# EAGLE board femtoBeacon_dongle_r2.0.6_RGB_PANELIZED (EAGLE 7.6.0), part 1 of 3
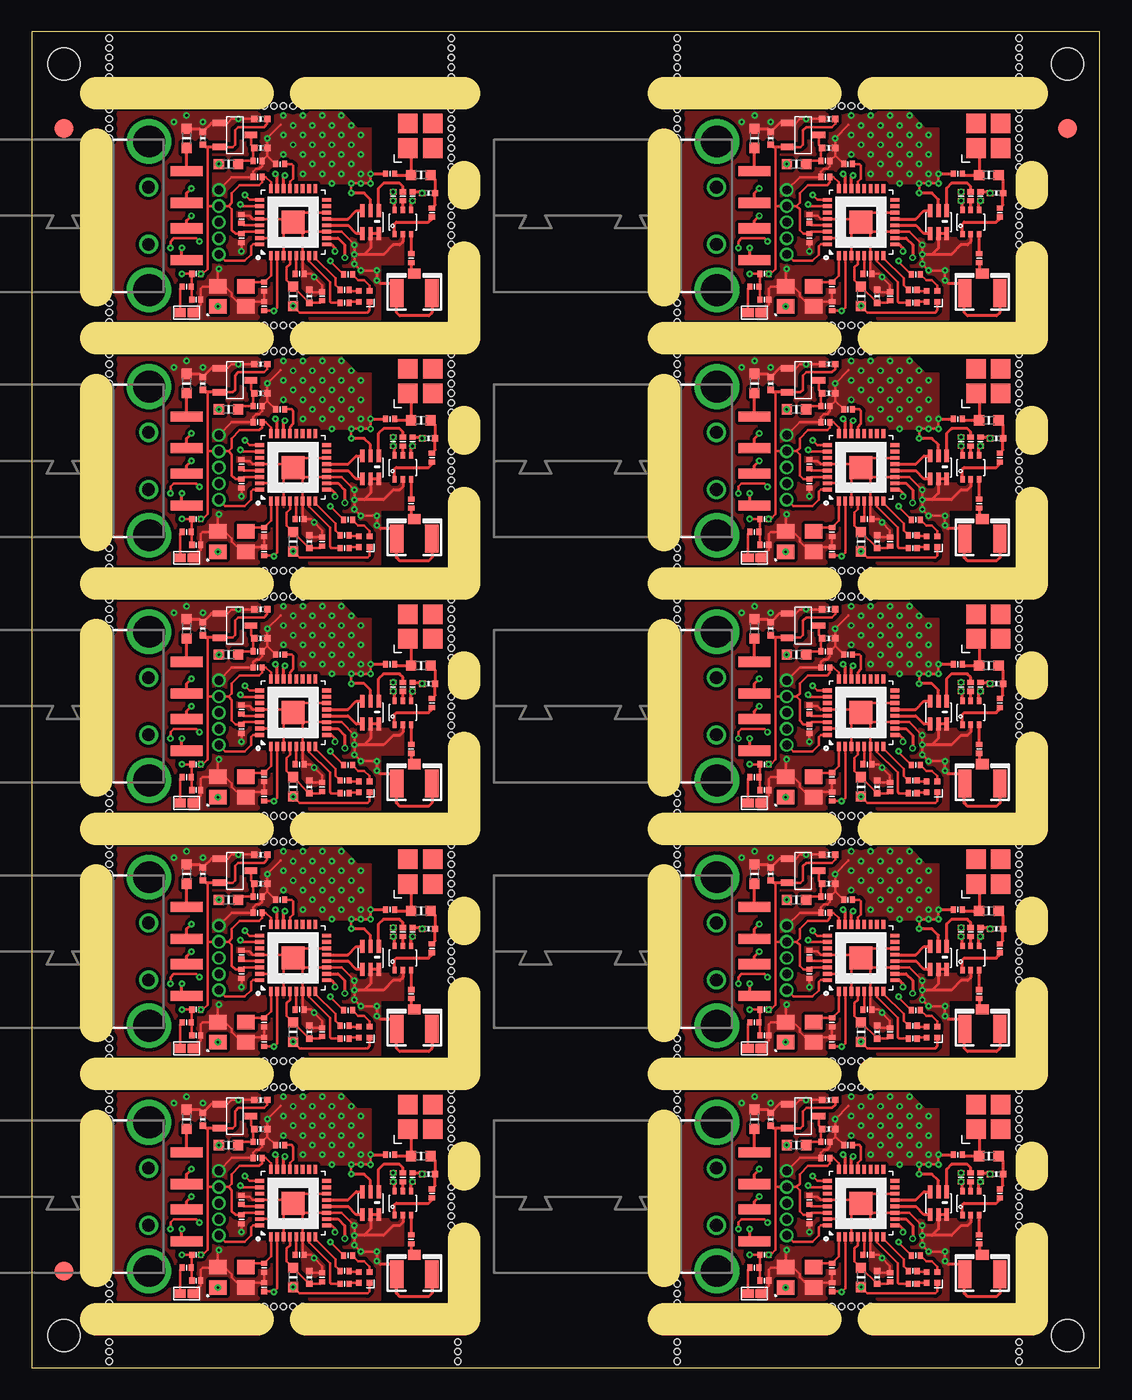
[diagram p0: board, top side]
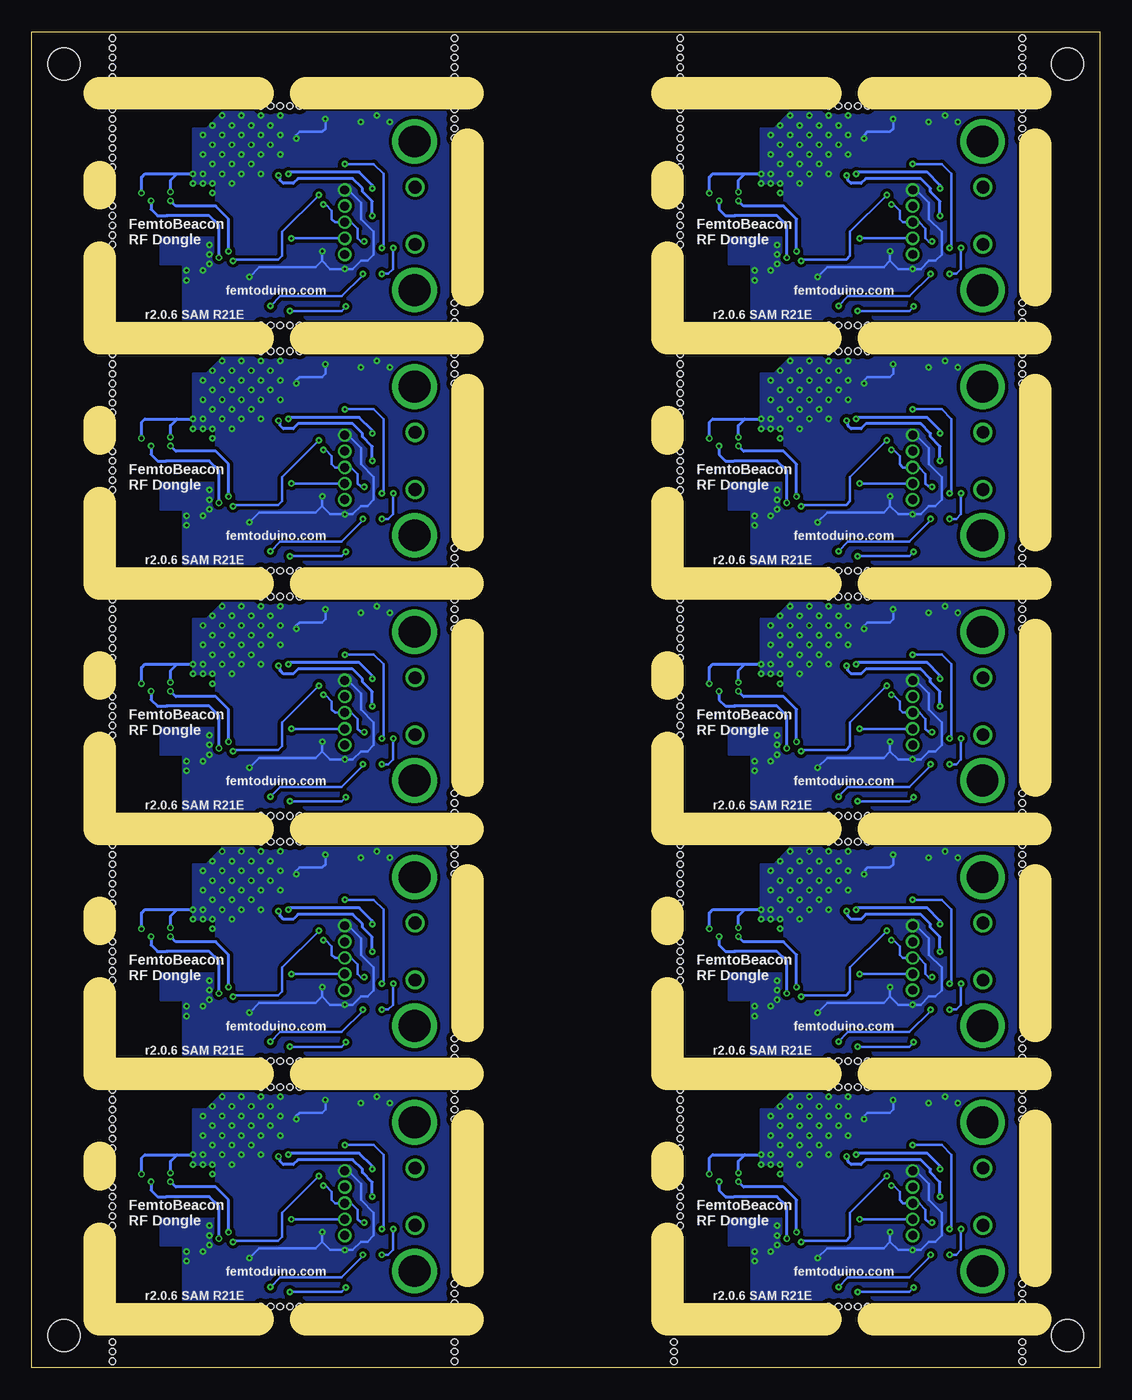
[diagram p1: board, bottom side, seen from below]

Size 84.07 x 105.16 mm. Coordinates in mm from the lower left corner, seen from the top.
Outline: 0,0 84.07,0 84.07,105.16 0,105.16 0,0
Copper layers (1*16): Top 0.035559375mm / dielectric 1.6mm / Bottom 0.035559375mm
Design rules "oshpark-2layer *": minimum track width 6mil, minimum drill 10mil, track to track 6mil, track to pad 6mil, pad to pad 6mil, via to via 6mil, smd to smd 6mil, copper to edge 15mil, drill to drill 6mil, minimum pad ring 5mil, minimum via ring 5mil, stop-mask expansion 2.5mil, vias tented up to drill 10mil, thermal gap 10mil
Holes 2.54 mm at 2.54,2.54 2.54,102.62 81.53,102.62 81.53,2.54
Holes 0.51 mm at 6.1,21.84 6.1,21.08 6.1,20.32 6.1,19.56 6.1,5.08 6.1,5.84 6.1,6.6 19.81,4.83 19.05,4.83 18.29,4.83 20.57,4.83 21.34,4.83 33.02,12.7 33.02,13.46 33.02,14.22 33.02,11.94 33.02,11.18 19.81,22.1 19.05,22.1 18.29,22.1 20.57,22.1 21.34,22.1 33.53,0.51 33.53,1.27 33.53,2.03 6.1,0.51 6.1,1.27 6.1,2.03 33.02,21.84 33.02,21.08 33.02,20.32 33.02,19.56 33.02,18.8 33.02,18.03 33.02,17.27 50.8,21.84 50.8,21.08 50.8,20.32 50.8,19.56 50.8,5.08 50.8,5.84 50.8,6.6 64.52,4.83 63.75,4.83 62.99,4.83 65.28,4.83 66.04,4.83 77.72,12.7 77.72,13.46 77.72,14.22 77.72,11.94 77.72,11.18 64.52,22.1 63.75,22.1 62.99,22.1 65.28,22.1 66.04,22.1 77.72,21.84 77.72,21.08 77.72,20.32 77.72,19.56 77.72,18.8 77.72,18.03 77.72,17.27 6.1,41.15 6.1,40.39 6.1,39.62 6.1,38.86 6.1,24.38 6.1,25.15 6.1,25.91 19.81,24.13 19.05,24.13 18.29,24.13 20.57,24.13 21.34,24.13 33.02,32 33.02,32.77 33.02,33.53 33.02,31.24 33.02,30.48 19.81,41.4 19.05,41.4 18.29,41.4 20.57,41.4 21.34,41.4 33.02,41.15 33.02,40.39 33.02,39.62 33.02,38.86 33.02,38.1 33.02,37.34 33.02,36.58 50.8,41.15 50.8,40.39 50.8,39.62 50.8,38.86 50.8,24.38 50.8,25.15 50.8,25.91 64.52,24.13 63.75,24.13 62.99,24.13 65.28,24.13 66.04,24.13 77.72,32 77.72,32.77 77.72,33.53 77.72,31.24 77.72,30.48 64.52,41.4 63.75,41.4 62.99,41.4 65.28,41.4 66.04,41.4 77.72,41.15 77.72,40.39 77.72,39.62 77.72,38.86 77.72,38.1 77.72,37.34 77.72,36.58 6.1,60.45 6.1,59.69 6.1,58.93 6.1,58.17 6.1,43.69 6.1,44.45 6.1,45.21 19.81,43.43 19.05,43.43 18.29,43.43 20.57,43.43 21.34,43.43 33.02,51.31 33.02,52.07 33.02,52.83 33.02,50.55 33.02,49.78 19.81,60.71 19.05,60.71 18.29,60.71 20.57,60.71 21.34,60.71 33.02,60.45 33.02,59.69 33.02,58.93 33.02,58.17 33.02,57.4 33.02,56.64 33.02,55.88 50.8,60.45 50.8,59.69 50.8,58.93 50.8,58.17 50.8,43.69 50.8,44.45 50.8,45.21 64.52,43.43 63.75,43.43 62.99,43.43 65.28,43.43 66.04,43.43 77.72,51.31 77.72,52.07 77.72,52.83 77.72,50.55 77.72,49.78 64.52,60.71 63.75,60.71 62.99,60.71 65.28,60.71 66.04,60.71 77.72,60.45 77.72,59.69 77.72,58.93 77.72,58.17 77.72,57.4 77.72,56.64 77.72,55.88 6.1,79.76 6.1,78.99 6.1,78.23 6.1,77.47 6.1,62.99 6.1,63.75 6.1,64.52 19.81,62.74 19.05,62.74 18.29,62.74 20.57,62.74 21.34,62.74 33.02,70.61 33.02,71.37 33.02,72.14 33.02,69.85 33.02,69.09 19.81,80.01 19.05,80.01 18.29,80.01 20.57,80.01 21.34,80.01 33.02,79.76 33.02,78.99 33.02,78.23 33.02,77.47 33.02,76.71 33.02,75.95 33.02,75.18 50.8,79.76 50.8,78.99 50.8,78.23 50.8,77.47 50.8,62.99 50.8,63.75 50.8,64.52 64.52,62.74 63.75,62.74 62.99,62.74 65.28,62.74 66.04,62.74 77.72,70.61 77.72,71.37 77.72,72.14 77.72,69.85 77.72,69.09 64.52,80.01 63.75,80.01 62.99,80.01 65.28,80.01 66.04,80.01 77.72,79.76 77.72,78.99 77.72,78.23 77.72,77.47 77.72,76.71 77.72,75.95 77.72,75.18 6.1,99.06 6.1,98.3 6.1,97.54 6.1,96.77 6.1,82.3 6.1,83.06 6.1,83.82 19.81,82.04 19.05,82.04 18.29,82.04 20.57,82.04 21.34,82.04 33.02,89.92 33.02,90.68 33.02,91.44 33.02,89.15 33.02,88.39 19.81,99.31 19.05,99.31 18.29,99.31 20.57,99.31 21.34,99.31 33.02,99.06 33.02,98.3 33.02,97.54 33.02,96.77 33.02,96.01 33.02,95.25 33.02,94.49 50.8,99.06 50.8,98.3 50.8,97.54 50.8,96.77 50.8,82.3 50.8,83.06 50.8,83.82 64.52,82.04 63.75,82.04 62.99,82.04 65.28,82.04 66.04,82.04 77.72,89.92 77.72,90.68 77.72,91.44 77.72,89.15 77.72,88.39 64.52,99.31 63.75,99.31 62.99,99.31 65.28,99.31 66.04,99.31 77.72,99.06 77.72,98.3 77.72,97.54 77.72,96.77 77.72,96.01 77.72,95.25 77.72,94.49 6.1,104.65 33.02,104.65 50.8,104.65 77.72,104.65 77.72,0.51 50.8,0.51 50.8,1.27 50.8,2.03 77.72,1.27 77.72,2.03 77.72,103.89 77.72,103.12 77.72,102.36 77.72,101.6 50.8,103.89 50.8,103.12 50.8,102.36 50.8,101.6 33.02,103.89 33.02,103.12 33.02,102.36 33.02,101.6 6.1,103.89 6.1,103.12 6.1,102.36 6.1,101.6
Milling: 54 lines

## Footprints (pad centres in the part's own frame; a part is rotated, then mirrored left to right if it is on the bottom)
AS222-92LF = smd 0.35 x 0.5: PIN1 -0.65,-0.95; PIN2 0,-0.95; PIN3 0.65,-0.95; PIN4 0.65,0.95; PIN5 0,0.95; PIN6 -0.65,0.95
SPST_SMD = smd 0.889 x 0.699: 1 -0.508,0; 2 0.508,0
PART = smd 0.4 x 0.5: 1 -0.35,0; 2 0.35,0
_0402MP = smd 0.5 x 0.5: 1 -0.508,0; 2 0.508,0
USB_A-SMT = drill 2.5 pad 3.302: D1 -5.85,2.958; D2 5.85,2.958 | drill 1: D3 -2.25,3; D4 2.25,3 | smd 0.8 x 2.5: D+ 1,0; D- -1,0; GND 3.5,0; VBUS -3.5,0
_0603MP = smd 0.8 x 0.8: 1 -0.762,0; 2 0.762,0
FIDUCIAL_1MM = smd 1.5 x 1.5: 1 0,0
MCP1700T-3302E/TT = smd 0.5 x 1: GND -0.95,-1.25; VIN 0,1.25; VOUT 0.95,-1.25
LRTB_R48G = smd 0.45 x 0.45: 1 0.425,0.425; 2 0.425,-0.425; 3 -0.425,-0.425; 4 -0.425,0.425
1X5_ROUND = drill 0.7 pad 1: P$1 0,0; P$2 0,-1.27; P$3 0,-2.54; P$4 0,-3.81; P$5 0,-5.08
0805_BALUN = smd 1 x 0.35: 1 -0.9,0.65; 2 -0.9,0; 3 -0.9,-0.65; 4 0.9,-0.65; 5 0.9,0; 6 0.9,0.65
QFN32 = smd 0.7 x 0.3: 1 -2.65,1.75; 2 -2.65,1.25; 3 -2.65,0.75; 4 -2.65,0.25; 5 -2.65,-0.25; 6 -2.65,-0.75; 7 -2.65,-1.25; 8 -2.65,-1.75; 17 2.65,-1.75; 18 2.65,-1.25; 19 2.65,-0.75; 20 2.65,-0.25; 21 2.65,0.25; 22 2.65,0.75; 23 2.65,1.25; 24 2.65,1.75 | smd 0.3 x 0.7: 9 -1.75,-2.65; 10 -1.25,-2.65; 11 -0.75,-2.65; 12 -0.25,-2.65; 13 0.25,-2.65; 14 0.75,-2.65; 15 1.25,-2.65; 16 1.75,-2.65; 25 1.75,2.65; 26 1.25,2.65; 27 0.75,2.65; 28 0.25,2.65; 29 -0.25,2.65; 30 -0.75,2.65; 31 -1.25,2.65; 32 -1.75,2.65 | smd 1.8 x 1.8: 33 0,0
0479480001 = smd 1.54 x 1.54: ANT -0.963,0.963; NC1 0.978,0.963; NC2 0.978,-0.978; NC3 -0.963,-0.978
U.FL = smd 2.2 x 1.05: 1 0,1.375; 2 0,-1.375 | smd 0.8 x 1: 3 1.525,0
TSX-3225 = smd 1.4 x 1.15: 1 -1.1,-0.8; 2 1.1,-0.8; 3 1.1,0.8; 4 -1.1,0.8

## Placement (x,y rotation side)
ASWITCH  AS222-92LF  [AS222-92LF]  29.21,12.95 0 top
ASWITCH1  AS222-92LF  [AS222-92LF]  73.91,12.95 0 top
ASWITCH2  AS222-92LF  [AS222-92LF]  29.21,32.26 0 top
ASWITCH3  AS222-92LF  [AS222-92LF]  73.91,32.26 0 top
ASWITCH4  AS222-92LF  [AS222-92LF]  29.21,51.56 0 top
ASWITCH5  AS222-92LF  [AS222-92LF]  73.91,51.56 0 top
ASWITCH6  AS222-92LF  [AS222-92LF]  29.21,70.87 0 top
ASWITCH7  AS222-92LF  [AS222-92LF]  73.91,70.87 0 top
ASWITCH8  AS222-92LF  [AS222-92LF]  29.21,90.17 0 top
ASWITCH9  AS222-92LF  [AS222-92LF]  73.91,90.17 0 top
BTN  DNP  [SPST_SMD]  12.19,5.84 0 top
BTN1  DNP  [SPST_SMD]  56.9,5.84 0 top
BTN2  DNP  [SPST_SMD]  12.19,25.15 0 top
BTN3  DNP  [SPST_SMD]  56.9,25.15 0 top
BTN4  DNP  [SPST_SMD]  12.19,44.45 0 top
BTN5  DNP  [SPST_SMD]  56.9,44.45 0 top
BTN6  DNP  [SPST_SMD]  12.19,63.75 0 top
BTN7  DNP  [SPST_SMD]  56.9,63.75 0 top
BTN8  DNP  [SPST_SMD]  12.19,83.06 0 top
BTN9  DNP  [SPST_SMD]  56.9,83.06 0 top
C1  0.1uF  [PART]  12.95,6.86 0 top
C2  0.1uF  [PART]  19.56,17.53 180 top
C3  0.1uF  [PART]  57.66,6.86 0 top
C4  0.1uF  [PART]  62.48,16.51 180 top
C5  2.2uF  [_0402MP]  18.03,21.08 180 top
C6  2.2uF  [_0402MP]  18.03,18.8 0 top
C7  0.47uF  [PART]  17.78,17.78 0 top
C8  0.1uF  [PART]  22.86,7.11 90 top
C9  0.1uF  [PART]  16.51,13.21 90 top
C10  0.1uF  [PART]  17.78,16.51 180 top
C11  1.2pF  [_0402MP]  31.24,15.24 180 top
C12  DNP  [PART]  72.9,16.76 180 top
C13  DNP  [PART]  28.19,16.76 180 top
C14  9pF  [PART]  18.29,6.35 270 top
C15  9pF  [PART]  18.29,7.87 270 top
C16  0.1uF  [PART]  16.51,11.68 270 top
C17  0.1uF  [PART]  21.08,8.89 0 top
C18  22pF  [PART]  29.21,14.99 270 top
C19  22pF  [PART]  29.97,14.99 270 top
C20  22pF  [PART]  28.45,14.99 90 top
C21  10uF  [_0402MP]  13.46,19.56 270 top
C22  10uF  [_0402MP]  21.84,7.11 270 top
C23  22pF  [PART]  29.87,10.11 90 top
C24  22pF  [PART]  31.5,13.72 90 top
C25  9pF  [PART]  62.99,6.35 270 top
C26  9pF  [PART]  62.99,7.87 270 top
C27  0.1uF  [PART]  61.21,11.68 270 top
C28  0.1uF  [PART]  65.79,8.89 0 top
C29  0.1uF  [PART]  64.26,17.53 180 top
C30  10uF  [_0402MP]  58.17,19.56 270 top
C31  10uF  [_0402MP]  66.55,7.11 270 top
C32  2.2uF  [_0402MP]  62.74,21.08 180 top
C33  2.2uF  [_0402MP]  62.74,18.8 0 top
C34  0.47uF  [PART]  62.48,17.78 0 top
C35  0.1uF  [PART]  67.56,7.11 90 top
C36  0.1uF  [PART]  61.21,13.21 90 top
C37  22pF  [PART]  73.91,14.99 270 top
C38  22pF  [PART]  74.68,14.99 270 top
C39  22pF  [PART]  73.15,14.99 90 top
C40  22pF  [PART]  74.57,10.11 90 top
C41  22pF  [PART]  76.2,13.72 90 top
C42  1.2pF  [_0402MP]  75.95,15.24 180 top
C43  0.1uF  [PART]  12.95,26.16 0 top
C44  0.1uF  [PART]  17.78,35.81 180 top
C45  DNP  [PART]  28.19,36.07 180 top
C46  9pF  [PART]  18.29,25.65 270 top
C47  9pF  [PART]  18.29,27.18 270 top
C48  0.1uF  [PART]  16.51,30.99 270 top
C49  0.1uF  [PART]  21.08,28.19 0 top
C50  0.1uF  [PART]  19.56,36.83 180 top
C51  10uF  [_0402MP]  13.46,38.86 270 top
C52  10uF  [_0402MP]  21.84,26.42 270 top
C53  2.2uF  [_0402MP]  18.03,40.39 180 top
C54  2.2uF  [_0402MP]  18.03,38.1 0 top
C55  0.47uF  [PART]  17.78,37.08 0 top
C56  0.1uF  [PART]  22.86,26.42 90 top
C57  0.1uF  [PART]  16.51,32.51 90 top
C58  22pF  [PART]  29.21,34.29 270 top
C59  22pF  [PART]  29.97,34.29 270 top
C60  22pF  [PART]  28.45,34.29 90 top
C61  22pF  [PART]  29.87,29.41 90 top
C62  22pF  [PART]  31.5,33.02 90 top
C63  1.2pF  [_0402MP]  31.24,34.54 180 top
C64  0.1uF  [PART]  57.66,26.16 0 top
C65  0.1uF  [PART]  62.48,35.81 180 top
C66  DNP  [PART]  72.9,36.07 180 top
C67  9pF  [PART]  62.99,25.65 270 top
C68  9pF  [PART]  62.99,27.18 270 top
C69  0.1uF  [PART]  61.21,30.99 270 top
C70  0.1uF  [PART]  65.79,28.19 0 top
C71  0.1uF  [PART]  64.26,36.83 180 top
C72  10uF  [_0402MP]  58.17,38.86 270 top
C73  10uF  [_0402MP]  66.55,26.42 270 top
C74  2.2uF  [_0402MP]  62.74,40.39 180 top
C75  2.2uF  [_0402MP]  62.74,38.1 0 top
C76  0.47uF  [PART]  62.48,37.08 0 top
C77  0.1uF  [PART]  67.56,26.42 90 top
C78  0.1uF  [PART]  61.21,32.51 90 top
C79  22pF  [PART]  73.91,34.29 270 top
C80  22pF  [PART]  74.68,34.29 270 top
C81  22pF  [PART]  73.15,34.29 90 top
C82  22pF  [PART]  74.57,29.41 90 top
C83  22pF  [PART]  76.2,33.02 90 top
C84  1.2pF  [_0402MP]  75.95,34.54 180 top
C85  0.1uF  [PART]  12.95,45.47 0 top
C86  0.1uF  [PART]  17.78,55.12 180 top
C87  DNP  [PART]  28.19,55.37 180 top
C88  9pF  [PART]  18.29,44.96 270 top
C89  9pF  [PART]  18.29,46.48 270 top
C90  0.1uF  [PART]  16.51,50.29 270 top
C91  0.1uF  [PART]  21.08,47.5 0 top
C92  0.1uF  [PART]  19.56,56.13 180 top
C93  10uF  [_0402MP]  13.46,58.17 270 top
C94  10uF  [_0402MP]  21.84,45.72 270 top
C95  2.2uF  [_0402MP]  18.03,59.69 180 top
C96  2.2uF  [_0402MP]  18.03,57.4 0 top
C97  0.47uF  [PART]  17.78,56.39 0 top
C98  0.1uF  [PART]  22.86,45.72 90 top
C99  0.1uF  [PART]  16.51,51.82 90 top
C100  22pF  [PART]  29.21,53.59 270 top
C101  22pF  [PART]  29.97,53.59 270 top
C102  22pF  [PART]  28.45,53.59 90 top
C103  22pF  [PART]  29.87,48.72 90 top
C104  22pF  [PART]  31.5,52.32 90 top
C105  1.2pF  [_0402MP]  31.24,53.85 180 top
C106  0.1uF  [PART]  57.66,45.47 0 top
C107  0.1uF  [PART]  62.48,55.12 180 top
C108  DNP  [PART]  72.9,55.37 180 top
C109  9pF  [PART]  62.99,44.96 270 top
C110  9pF  [PART]  62.99,46.48 270 top
C111  0.1uF  [PART]  61.21,50.29 270 top
C112  0.1uF  [PART]  65.79,47.5 0 top
C113  0.1uF  [PART]  64.26,56.13 180 top
C114  10uF  [_0402MP]  58.17,58.17 270 top
C115  10uF  [_0402MP]  66.55,45.72 270 top
C116  2.2uF  [_0402MP]  62.74,59.69 180 top
C117  2.2uF  [_0402MP]  62.74,57.4 0 top
C118  0.47uF  [PART]  62.48,56.39 0 top
C119  0.1uF  [PART]  67.56,45.72 90 top
C120  0.1uF  [PART]  61.21,51.82 90 top
C121  22pF  [PART]  73.91,53.59 270 top
C122  22pF  [PART]  74.68,53.59 270 top
C123  22pF  [PART]  73.15,53.59 90 top
C124  22pF  [PART]  74.57,48.72 90 top
C125  22pF  [PART]  76.2,52.32 90 top
C126  1.2pF  [_0402MP]  75.95,53.85 180 top
C127  0.1uF  [PART]  12.95,64.77 0 top
C128  0.1uF  [PART]  17.78,74.42 180 top
C129  DNP  [PART]  28.19,74.68 180 top
C130  9pF  [PART]  18.29,64.26 270 top
C131  9pF  [PART]  18.29,65.79 270 top
C132  0.1uF  [PART]  16.51,69.6 270 top
C133  0.1uF  [PART]  21.08,66.8 0 top
C134  0.1uF  [PART]  19.56,75.44 180 top
C135  10uF  [_0402MP]  13.46,77.47 270 top
C136  10uF  [_0402MP]  21.84,65.02 270 top
C137  2.2uF  [_0402MP]  18.03,78.99 180 top
C138  2.2uF  [_0402MP]  18.03,76.71 0 top
C139  0.47uF  [PART]  17.78,75.69 0 top
C140  0.1uF  [PART]  22.86,65.02 90 top
C141  0.1uF  [PART]  16.51,71.12 90 top
C142  22pF  [PART]  29.21,72.9 270 top
C143  22pF  [PART]  29.97,72.9 270 top
C144  22pF  [PART]  28.45,72.9 90 top
C145  22pF  [PART]  29.87,68.02 90 top
C146  22pF  [PART]  31.5,71.63 90 top
C147  1.2pF  [_0402MP]  31.24,73.15 180 top
C148  0.1uF  [PART]  57.66,64.77 0 top
C149  0.1uF  [PART]  62.48,74.42 180 top
C150  DNP  [PART]  72.9,74.68 180 top
C151  9pF  [PART]  62.99,64.26 270 top
C152  9pF  [PART]  62.99,65.79 270 top
C153  0.1uF  [PART]  61.21,69.6 270 top
C154  0.1uF  [PART]  65.79,66.8 0 top
C155  0.1uF  [PART]  64.26,75.44 180 top
C156  10uF  [_0402MP]  58.17,77.47 270 top
C157  10uF  [_0402MP]  66.55,65.02 270 top
C158  2.2uF  [_0402MP]  62.74,78.99 180 top
C159  2.2uF  [_0402MP]  62.74,76.71 0 top
C160  0.47uF  [PART]  62.48,75.69 0 top
C161  0.1uF  [PART]  67.56,65.02 90 top
C162  0.1uF  [PART]  61.21,71.12 90 top
C163  22pF  [PART]  73.91,72.9 270 top
C164  22pF  [PART]  74.68,72.9 270 top
C165  22pF  [PART]  73.15,72.9 90 top
C166  22pF  [PART]  74.57,68.02 90 top
C167  22pF  [PART]  76.2,71.63 90 top
C168  1.2pF  [_0402MP]  75.95,73.15 180 top
C169  0.1uF  [PART]  12.95,84.07 0 top
C170  0.1uF  [PART]  17.78,93.73 180 top
C171  DNP  [PART]  28.19,93.98 180 top
C172  9pF  [PART]  18.29,83.57 270 top
C173  9pF  [PART]  18.29,85.09 270 top
C174  0.1uF  [PART]  16.51,88.9 270 top
C175  0.1uF  [PART]  21.08,86.11 0 top
C176  0.1uF  [PART]  19.56,94.74 180 top
C177  10uF  [_0402MP]  13.46,96.77 270 top
C178  10uF  [_0402MP]  21.84,84.33 270 top
C179  2.2uF  [_0402MP]  18.03,98.3 180 top
C180  2.2uF  [_0402MP]  18.03,96.01 0 top
C181  0.47uF  [PART]  17.78,95 0 top
C182  0.1uF  [PART]  22.86,84.33 90 top
C183  0.1uF  [PART]  16.51,90.42 90 top
C184  22pF  [PART]  29.21,92.2 270 top
C185  22pF  [PART]  29.97,92.2 270 top
C186  22pF  [PART]  28.45,92.2 90 top
C187  22pF  [PART]  29.87,87.33 90 top
C188  22pF  [PART]  31.5,90.93 90 top
C189  1.2pF  [_0402MP]  31.24,92.46 180 top
C190  0.1uF  [PART]  57.66,84.07 0 top
C191  0.1uF  [PART]  62.48,93.73 180 top
C192  DNP  [PART]  72.9,93.98 180 top
C193  9pF  [PART]  62.99,83.57 270 top
C194  9pF  [PART]  62.99,85.09 270 top
C195  0.1uF  [PART]  61.21,88.9 270 top
C196  0.1uF  [PART]  65.79,86.11 0 top
C197  0.1uF  [PART]  64.26,94.74 180 top
C198  10uF  [_0402MP]  58.17,96.77 270 top
C199  10uF  [_0402MP]  66.55,84.33 270 top
C200  2.2uF  [_0402MP]  62.74,98.3 180 top
C201  2.2uF  [_0402MP]  62.74,96.01 0 top
C202  0.47uF  [PART]  62.48,95 0 top
C203  0.1uF  [PART]  67.56,84.33 90 top
C204  0.1uF  [PART]  61.21,90.42 90 top
C205  22pF  [PART]  73.91,92.2 270 top
C206  22pF  [PART]  74.68,92.2 270 top
C207  22pF  [PART]  73.15,92.2 90 top
C208  22pF  [PART]  74.57,87.33 90 top
C209  22pF  [PART]  76.2,90.93 90 top
C210  1.2pF  [_0402MP]  75.95,92.46 180 top
CN1  [USB_A-SMT]  12.19,13.46 90 top
CN2  [USB_A-SMT]  56.9,13.46 90 top
CN3  [USB_A-SMT]  12.19,32.77 90 top
CN4  [USB_A-SMT]  56.9,32.77 90 top
CN5  [USB_A-SMT]  12.19,52.07 90 top
CN6  [USB_A-SMT]  56.9,52.07 90 top
CN7  [USB_A-SMT]  12.19,71.37 90 top
CN8  [USB_A-SMT]  56.9,71.37 90 top
CN9  [USB_A-SMT]  12.19,90.68 90 top
CN10  [USB_A-SMT]  56.9,90.68 90 top
FB1  [_0603MP]  12.19,19.56 90 top
FB2  [_0603MP]  15.49,17.53 0 top
FB3  [_0603MP]  56.9,19.56 90 top
FB4  [_0603MP]  60.2,17.53 0 top
FB5  [_0603MP]  12.19,38.86 90 top
FB6  [_0603MP]  15.49,36.83 0 top
FB7  [_0603MP]  56.9,38.86 90 top
FB8  [_0603MP]  60.2,36.83 0 top
FB9  [_0603MP]  12.19,58.17 90 top
FB10  [_0603MP]  15.49,56.13 0 top
FB11  [_0603MP]  56.9,58.17 90 top
FB12  [_0603MP]  60.2,56.13 0 top
FB13  [_0603MP]  12.19,77.47 90 top
FB14  [_0603MP]  15.49,75.44 0 top
FB15  [_0603MP]  56.9,77.47 90 top
FB16  [_0603MP]  60.2,75.44 0 top
FB17  [_0603MP]  12.19,96.77 90 top
FB18  [_0603MP]  15.49,94.74 0 top
FB19  [_0603MP]  56.9,96.77 90 top
FB20  [_0603MP]  60.2,94.74 0 top
FID1  FIDUCIAL  [FIDUCIAL_1MM]  2.54,7.62 0 top
FID2  FIDUCIAL  [FIDUCIAL_1MM]  2.54,97.54 0 top
FID3  FIDUCIAL  [FIDUCIAL_1MM]  81.53,97.54 0 top
L1  1.8nH  [_0603MP]  30.63,16.66 0 top
L2  10uH  [_0603MP]  65.28,7.11 90 top
L3  1.8nH  [_0603MP]  75.34,16.66 0 top
L4  10uH  [_0603MP]  20.57,26.42 90 top
L5  1.8nH  [_0603MP]  30.63,35.97 0 top
L6  10uH  [_0603MP]  20.57,7.11 90 top
L7  10uH  [_0603MP]  65.28,26.42 90 top
L8  1.8nH  [_0603MP]  75.34,35.97 0 top
L9  10uH  [_0603MP]  20.57,45.72 90 top
L10  1.8nH  [_0603MP]  30.63,55.27 0 top
L11  10uH  [_0603MP]  65.28,45.72 90 top
L12  1.8nH  [_0603MP]  75.34,55.27 0 top
L13  10uH  [_0603MP]  20.57,65.02 90 top
L14  1.8nH  [_0603MP]  30.63,74.57 0 top
L15  10uH  [_0603MP]  65.28,65.02 90 top
L16  1.8nH  [_0603MP]  75.34,74.57 0 top
L17  10uH  [_0603MP]  20.57,84.33 90 top
L18  1.8nH  [_0603MP]  30.63,93.88 0 top
L19  10uH  [_0603MP]  65.28,84.33 90 top
L20  1.8nH  [_0603MP]  75.34,93.88 0 top
LDO_VREG  MCP1700T-3302E/TT  [MCP1700T-3302E/TT]  16,19.81 270 top
LDO_VREG1  MCP1700T-3302E/TT  [MCP1700T-3302E/TT]  60.71,19.81 270 top
LDO_VREG2  MCP1700T-3302E/TT  [MCP1700T-3302E/TT]  16,39.12 270 top
LDO_VREG3  MCP1700T-3302E/TT  [MCP1700T-3302E/TT]  60.71,39.12 270 top
LDO_VREG4  MCP1700T-3302E/TT  [MCP1700T-3302E/TT]  16,58.42 270 top
LDO_VREG5  MCP1700T-3302E/TT  [MCP1700T-3302E/TT]  60.71,58.42 270 top
LDO_VREG6  MCP1700T-3302E/TT  [MCP1700T-3302E/TT]  16,77.72 270 top
LDO_VREG7  MCP1700T-3302E/TT  [MCP1700T-3302E/TT]  60.71,77.72 270 top
LDO_VREG8  MCP1700T-3302E/TT  [MCP1700T-3302E/TT]  16,97.03 270 top
LDO_VREG9  MCP1700T-3302E/TT  [MCP1700T-3302E/TT]  60.71,97.03 270 top
R1  330  [PART]  12.19,7.87 0 top
R2  10K  [PART]  12.95,8.89 0 top
R3  330  [PART]  56.9,7.87 0 top
R4  330  [PART]  24.64,6.6 0 top
R5  10K  [PART]  57.66,8.89 0 top
R6  330  [PART]  24.64,7.62 0 top
R7  330  [PART]  24.89,8.84 0 top
R8  330  [PART]  69.34,6.6 0 top
R9  330  [PART]  69.34,7.62 0 top
R10  330  [PART]  69.6,8.84 0 top
R11  330  [PART]  12.19,27.18 0 top
R12  10K  [PART]  12.95,28.19 0 top
R13  330  [PART]  24.64,25.91 0 top
R14  330  [PART]  24.64,26.92 0 top
R15  330  [PART]  24.89,28.14 0 top
R16  330  [PART]  56.9,27.18 0 top
R17  10K  [PART]  57.66,28.19 0 top
R18  330  [PART]  69.34,25.91 0 top
R19  330  [PART]  69.34,26.92 0 top
R20  330  [PART]  69.6,28.14 0 top
R21  330  [PART]  12.19,46.48 0 top
R22  10K  [PART]  12.95,47.5 0 top
R23  330  [PART]  24.64,45.21 0 top
R24  330  [PART]  24.64,46.23 0 top
R25  330  [PART]  24.89,47.45 0 top
R26  330  [PART]  56.9,46.48 0 top
R27  10K  [PART]  57.66,47.5 0 top
R28  330  [PART]  69.34,45.21 0 top
R29  330  [PART]  69.34,46.23 0 top
R30  330  [PART]  69.6,47.45 0 top
R31  330  [PART]  12.19,65.79 0 top
R32  10K  [PART]  12.95,66.8 0 top
R33  330  [PART]  24.64,64.52 0 top
R34  330  [PART]  24.64,65.53 0 top
R35  330  [PART]  24.89,66.75 0 top
R36  330  [PART]  56.9,65.79 0 top
R37  10K  [PART]  57.66,66.8 0 top
R38  330  [PART]  69.34,64.52 0 top
R39  330  [PART]  69.34,65.53 0 top
R40  330  [PART]  69.6,66.75 0 top
R41  330  [PART]  12.19,85.09 0 top
R42  10K  [PART]  12.95,86.11 0 top
R43  330  [PART]  24.64,83.82 0 top
R44  330  [PART]  24.64,84.84 0 top
R45  330  [PART]  24.89,86.06 0 top
R46  330  [PART]  56.9,85.09 0 top
R47  10K  [PART]  57.66,86.11 0 top
R48  330  [PART]  69.34,83.82 0 top
R49  330  [PART]  69.34,84.84 0 top
R50  330  [PART]  69.6,86.06 0 top
RGBLED  LRTB_R48G  [LRTB_R48G]  26.16,7.11 270 top
RGBLED1  LRTB_R48G  [LRTB_R48G]  70.87,7.11 270 top
RGBLED2  LRTB_R48G  [LRTB_R48G]  26.16,26.42 270 top
RGBLED3  LRTB_R48G  [LRTB_R48G]  70.87,26.42 270 top
RGBLED4  LRTB_R48G  [LRTB_R48G]  26.16,45.72 270 top
RGBLED5  LRTB_R48G  [LRTB_R48G]  70.87,45.72 270 top
RGBLED6  LRTB_R48G  [LRTB_R48G]  26.16,65.02 270 top
RGBLED7  LRTB_R48G  [LRTB_R48G]  70.87,65.02 270 top
RGBLED8  LRTB_R48G  [LRTB_R48G]  26.16,84.33 270 top
RGBLED9  LRTB_R48G  [LRTB_R48G]  70.87,84.33 270 top
U$1  1X5_ROUND  [1X5_ROUND]  14.73,15.49 0 top
U$2  JOHANSON_2450BM15A0015E  [0805_BALUN]  71.37,12.95 270 top
U$3  ATSAMR21E18A-MUT  [QFN32]  65.28,12.95 90 top
U$4  1X5_ROUND  [1X5_ROUND]  59.44,15.49 0 top
U$5  0479480001  [0479480001]  75.29,19.74 90 top
U$6  0479480001  [0479480001]  30.58,19.74 90 top
U$7  JOHANSON_2450BM15A0015E  [0805_BALUN]  26.67,32.26 270 top
U$8  ATSAMR21E18A-MUT  [QFN32]  20.57,32.26 90 top
U$9  1X5_ROUND  [1X5_ROUND]  14.73,34.8 0 top
U$10  0479480001  [0479480001]  30.58,39.04 90 top
U$11  JOHANSON_2450BM15A0015E  [0805_BALUN]  71.37,32.26 270 top
U$12  JOHANSON_2450BM15A0015E  [0805_BALUN]  26.67,12.95 270 top
U$13  ATSAMR21E18A-MUT  [QFN32]  65.28,32.26 90 top
U$14  1X5_ROUND  [1X5_ROUND]  59.44,34.8 0 top
U$15  0479480001  [0479480001]  75.29,39.04 90 top
U$16  JOHANSON_2450BM15A0015E  [0805_BALUN]  26.67,51.56 270 top
U$17  ATSAMR21E18A-MUT  [QFN32]  20.57,51.56 90 top
U$18  1X5_ROUND  [1X5_ROUND]  14.73,54.1 0 top
U$19  0479480001  [0479480001]  30.58,58.34 90 top
U$20  JOHANSON_2450BM15A0015E  [0805_BALUN]  71.37,51.56 270 top
U$21  ATSAMR21E18A-MUT  [QFN32]  65.28,51.56 90 top
U$22  1X5_ROUND  [1X5_ROUND]  59.44,54.1 0 top
U$23  0479480001  [0479480001]  75.29,58.34 90 top
U$24  JOHANSON_2450BM15A0015E  [0805_BALUN]  26.67,70.87 270 top
U$25  ATSAMR21E18A-MUT  [QFN32]  20.57,70.87 90 top
U$26  1X5_ROUND  [1X5_ROUND]  14.73,73.41 0 top
U$27  0479480001  [0479480001]  30.58,77.65 90 top
U$28  JOHANSON_2450BM15A0015E  [0805_BALUN]  71.37,70.87 270 top
U$29  ATSAMR21E18A-MUT  [QFN32]  65.28,70.87 90 top
U$30  1X5_ROUND  [1X5_ROUND]  59.44,73.41 0 top
U$31  0479480001  [0479480001]  75.29,77.65 90 top
U$32  JOHANSON_2450BM15A0015E  [0805_BALUN]  26.67,90.17 270 top
U$33  ATSAMR21E18A-MUT  [QFN32]  20.57,90.17 90 top
U$34  1X5_ROUND  [1X5_ROUND]  14.73,92.71 0 top
U$35  0479480001  [0479480001]  30.58,96.95 90 top
U$36  JOHANSON_2450BM15A0015E  [0805_BALUN]  71.37,90.17 270 top
U$37  ATSAMR21E18A-MUT  [QFN32]  65.28,90.17 90 top
U$38  1X5_ROUND  [1X5_ROUND]  59.44,92.71 0 top
U$39  0479480001  [0479480001]  75.29,96.95 90 top
U$76  ATSAMR21E18A-MUT  [QFN32]  20.57,12.95 90 top
UFLANT  uFL  [U.FL]  30.12,7.37 90 top
UFLANT1  uFL  [U.FL]  74.83,7.37 90 top
UFLANT2  uFL  [U.FL]  30.12,26.67 90 top
UFLANT3  uFL  [U.FL]  74.83,26.67 90 top
UFLANT4  uFL  [U.FL]  30.12,45.97 90 top
UFLANT5  uFL  [U.FL]  74.83,45.97 90 top
UFLANT6  uFL  [U.FL]  30.12,65.28 90 top
UFLANT7  uFL  [U.FL]  74.83,65.28 90 top
UFLANT8  uFL  [U.FL]  30.12,84.58 90 top
UFLANT9  uFL  [U.FL]  74.83,84.58 90 top
XOSCRF  16MHz  [TSX-3225]  15.75,7.11 0 top
XOSCRF1  16MHz  [TSX-3225]  60.45,7.11 0 top
XOSCRF2  16MHz  [TSX-3225]  15.75,26.42 0 top
XOSCRF3  16MHz  [TSX-3225]  60.45,26.42 0 top
XOSCRF4  16MHz  [TSX-3225]  15.75,45.72 0 top
XOSCRF5  16MHz  [TSX-3225]  60.45,45.72 0 top
XOSCRF6  16MHz  [TSX-3225]  15.75,65.02 0 top
XOSCRF7  16MHz  [TSX-3225]  60.45,65.02 0 top
XOSCRF8  16MHz  [TSX-3225]  15.75,84.33 0 top
XOSCRF9  16MHz  [TSX-3225]  60.45,84.33 0 top

## Library data of the parts
ASWITCH ASWITCH1-ASWITCH9 = skyworks_solutions; MFR_ID: AS222-92LF
BTN BTN1-BTN9 = femtoduino
C1-C4 C8-C10 C16 C17 C27-C29 C35 C36 C43 C44 C48-C50 C56 C57 C64 C65 C69-C71 C77 C78 C85 C86 C90-C92 C98 C99 C106 C107 C111-C113 C119 C120 C127 C128 C132-C134 C140 C141 C148 C149 C153-C155 C161 C162 C169 C170 C174-C176 C182 C183 C190 C191 C195-C197 C203 C204 = parts_0201; MFR_ID: GRM033C80J104KE84D
C5 C6 C32 C33 C53 C54 C74 C75 C95 C96 C116 C117 C137 C138 C158 C159 C179 C180 C200 C201 = microbuilder; MFR_ID: C1005X5R1A225K050BC
C7 C34 C55 C76 C97 C118 C139 C160 C181 C202 = parts_0201; MFR_ID: C0603X5R0J474K030BC
C11 C42 C63 C84 C105 C126 C147 C168 C189 C210 = microbuilder; MFR_ID: GRM1555C1H1R2BA01D
C12 C13 C45 C66 C87 C108 C129 C150 C171 C192 = parts_0201
C14 C15 C25 C26 C46 C47 C67 C68 C88 C89 C109 C110 C130 C131 C151 C152 C172 C173 C193 C194 = parts_0201; MFR_ID: C0603C0G1E090B030BG
C18-C20 C23 C24 C37-C41 C58-C62 C79-C83 C100-C104 C121-C125 C142-C146 C163-C167 C184-C188 C205-C209 = parts_0201; MFR_ID: GRM0335C1E220JA01D
C21 C22 C30 C31 C51 C52 C72 C73 C93 C94 C114 C115 C135 C136 C156 C157 C177 C178 C198 C199 = microbuilder; MFR_ID: AMK105CBJ106MV-F
CN1-CN10 = microbuilder; MFR_ID: Keystone 931
FB1-FB20 = microbuilder; MFR_ID: BLM18RK102SN1D
FID1-FID3 = adafruit
L1 L3 L5 L8 L10 L12 L14 L16 L18 L20 = microbuilder; MFR_ID: L-14C1N8SV4T
L2 L4 L6 L7 L9 L11 L13 L15 L17 L19 = microbuilder; MFR_ID: LQM18FN100M00D
LDO_VREG LDO_VREG1-LDO_VREG9 = MCP1700T-3302E_TT; MFR_ID: MCP1700T-3302E/TT
R1 R3 R4 R6-R11 R13-R16 R18-R21 R23-R26 R28-R31 R33-R36 R38-R41 R43-R46 R48-R50 = parts_0201; MFR_ID: CRCW0201330RJNED
R2 R5 R12 R17 R22 R27 R32 R37 R42 R47 = parts_0201; MFR_ID: RC0402FR-0710KL
RGBLED RGBLED1-RGBLED9 = osram_opto_LED; MFR_ID: LRTB R48G
U$1 U$4 U$9 U$14 U$18 U$22 U$26 U$30 U$34 U$38 = pins_fine_pitch
U$2 U$7 U$11 U$12 U$16 U$20 U$24 U$28 U$32 U$36 = balun; MFR_ID: 2450BM15A0015E
U$3 U$8 U$13 U$17 U$21 U$25 U$29 U$33 U$37 U$76 = atmel-samr21; MFR_ID: ATSAMR21E18A-MFT
U$5 U$6 U$10 U$15 U$19 U$23 U$27 U$31 U$35 U$39 = molex-antenna-2.4GHz; MFR_ID: 51T4020
UFLANT UFLANT1-UFLANT9 = adafruit; MFR_ID: 734120110
XOSCRF XOSCRF1-XOSCRF9 = crystals; MFR_ID: TSX-3225 16.0000MF09Z-AC0

## Nets
3.3V: C5.1 C10.1 C16.1 C21.2 L6.1 LDO_VREG.VOUT R2.2 RGBLED.1 U$1.P$2 U$76.24 U$76.30
3.3V1: C4.1 C27.1 C30.2 C32.1 L2.1 LDO_VREG1.VOUT R5.2 RGBLED1.1 U$3.24 U$3.30 U$4.P$2
3.3V2: C44.1 C48.1 C51.2 C53.1 L4.1 LDO_VREG2.VOUT R12.2 RGBLED2.1 U$8.24 U$8.30 U$9.P$2
3.3V3: C65.1 C69.1 C72.2 C74.1 L7.1 LDO_VREG3.VOUT R17.2 RGBLED3.1 U$13.24 U$13.30 U$14.P$2
3.3V4: C86.1 C90.1 C93.2 C95.1 L9.1 LDO_VREG4.VOUT R22.2 RGBLED4.1 U$17.24 U$17.30 U$18.P$2
3.3V5: C107.1 C111.1 C114.2 C116.1 L11.1 LDO_VREG5.VOUT R27.2 RGBLED5.1 U$21.24 U$21.30 U$22.P$2
3.3V6: C128.1 C132.1 C135.2 C137.1 L13.1 LDO_VREG6.VOUT R32.2 RGBLED6.1 U$25.24 U$25.30 U$26.P$2
3.3V7: C149.1 C153.1 C156.2 C158.1 L15.1 LDO_VREG7.VOUT R37.2 RGBLED7.1 U$29.24 U$29.30 U$30.P$2
3.3V8: C170.1 C174.1 C177.2 C179.1 L17.1 LDO_VREG8.VOUT R42.2 RGBLED8.1 U$33.24 U$33.30 U$34.P$2
3.3V9: C191.1 C195.1 C198.2 C200.1 L19.1 LDO_VREG9.VOUT R47.2 RGBLED9.1 U$37.24 U$37.30 U$38.P$2
ANT_LINE: C13.1 L1.1 U$6.ANT
ANT_LINE1: C12.1 L3.1 U$5.ANT
ANT_LINE2: C45.1 L5.1 U$10.ANT
ANT_LINE3: C66.1 L8.1 U$15.ANT
ANT_LINE4: C87.1 L10.1 U$19.ANT
ANT_LINE5: C108.1 L12.1 U$23.ANT
ANT_LINE6: C129.1 L14.1 U$27.ANT
ANT_LINE7: C150.1 L16.1 U$31.ANT
ANT_LINE8: C171.1 L18.1 U$35.ANT
ANT_LINE9: C192.1 L20.1 U$39.ANT
ANT_OUT: C18.1 U$12.1
ANT_OUT1: C37.1 U$2.1
ANT_OUT2: C58.1 U$7.1
ANT_OUT3: C79.1 U$11.1
ANT_OUT4: C100.1 U$16.1
ANT_OUT5: C121.1 U$20.1
ANT_OUT6: C142.1 U$24.1
ANT_OUT7: C163.1 U$28.1
ANT_OUT8: C184.1 U$32.1
ANT_OUT9: C205.1 U$36.1
ANT_SMD: C11.1 C24.2 L1.2
ANT_SMD1: C41.2 C42.1 L3.2
ANT_SMD2: C62.2 C63.1 L5.2
ANT_SMD3: C83.2 C84.1 L8.2
ANT_SMD4: C104.2 C105.1 L10.2
ANT_SMD5: C125.2 C126.1 L12.2
ANT_SMD6: C146.2 C147.1 L14.2
ANT_SMD7: C167.2 C168.1 L16.2
ANT_SMD8: C188.2 C189.1 L18.2
ANT_SMD9: C209.2 C210.1 L20.2
ANT_UFL: C23.1 UFLANT.3
ANT_UFL1: C40.1 UFLANT1.3
ANT_UFL2: C61.1 UFLANT2.3
ANT_UFL3: C82.1 UFLANT3.3
ANT_UFL4: C103.1 UFLANT4.3
ANT_UFL5: C124.1 UFLANT5.3
ANT_UFL6: C145.1 UFLANT6.3
ANT_UFL7: C166.1 UFLANT7.3
ANT_UFL8: C187.1 UFLANT8.3
ANT_UFL9: C208.1 UFLANT9.3
AVDD: C17.1 U$76.5
AVDD1: C28.1 U$3.5
AVDD2: C49.1 U$8.5
AVDD3: C70.1 U$13.5
AVDD4: C91.1 U$17.5
AVDD5: C112.1 U$21.5
AVDD6: C133.1 U$25.5
AVDD7: C154.1 U$29.5
AVDD8: C175.1 U$33.5
AVDD9: C196.1 U$37.5
DVDD: C2.1 U$76.21
DVDD1: C29.1 U$3.21
DVDD2: C50.1 U$8.21
DVDD3: C71.1 U$13.21
DVDD4: C92.1 U$17.21
DVDD5: C113.1 U$21.21
DVDD6: C134.1 U$25.21
DVDD7: C155.1 U$29.21
DVDD8: C176.1 U$33.21
DVDD9: C197.1 U$37.21
GND: ASWITCH.PIN2 BTN.2 C1.2 C2.2 C5.2 C6.2 C7.2 C8.2 C9.2 C10.2 C11.2 C13.2 C14.1 C15.2 C16.2 C17.2 C19.1 C20.2 C21.1 C22.1 FB1.2 LDO_VREG.GND U$1.P$1 U$12.2 U$12.5 U$12.6 U$76.3 U$76.6 U$76.11 U$76.14 U$76.28 U$76.33 UFLANT.1 UFLANT.2 XOSCRF.2 XOSCRF.4
GND1: ASWITCH1.PIN2 BTN1.2 C3.2 C4.2 C12.2 C25.1 C26.2 C27.2 C28.2 C29.2 C30.1 C31.1 C32.2 C33.2 C34.2 C35.2 C36.2 C38.1 C39.2 C42.2 FB3.2 LDO_VREG1.GND U$2.2 U$2.5 U$2.6 U$3.3 U$3.6 U$3.11 U$3.14 U$3.28 U$3.33 U$4.P$1 UFLANT1.1 UFLANT1.2 XOSCRF1.2 XOSCRF1.4
GND2: ASWITCH2.PIN2 BTN2.2 C43.2 C44.2 C45.2 C46.1 C47.2 C48.2 C49.2 C50.2 C51.1 C52.1 C53.2 C54.2 C55.2 C56.2 C57.2 C59.1 C60.2 C63.2 FB5.2 LDO_VREG2.GND U$7.2 U$7.5 U$7.6 U$8.3 U$8.6 U$8.11 U$8.14 U$8.28 U$8.33 U$9.P$1 UFLANT2.1 UFLANT2.2 XOSCRF2.2 XOSCRF2.4
GND3: ASWITCH3.PIN2 BTN3.2 C64.2 C65.2 C66.2 C67.1 C68.2 C69.2 C70.2 C71.2 C72.1 C73.1 C74.2 C75.2 C76.2 C77.2 C78.2 C80.1 C81.2 C84.2 FB7.2 LDO_VREG3.GND U$11.2 U$11.5 U$11.6 U$13.3 U$13.6 U$13.11 U$13.14 U$13.28 U$13.33 U$14.P$1 UFLANT3.1 UFLANT3.2 XOSCRF3.2 XOSCRF3.4
GND4: ASWITCH4.PIN2 BTN4.2 C85.2 C86.2 C87.2 C88.1 C89.2 C90.2 C91.2 C92.2 C93.1 C94.1 C95.2 C96.2 C97.2 C98.2 C99.2 C101.1 C102.2 C105.2 FB9.2 LDO_VREG4.GND U$16.2 U$16.5 U$16.6 U$17.3 U$17.6 U$17.11 U$17.14 U$17.28 U$17.33 U$18.P$1 UFLANT4.1 UFLANT4.2 XOSCRF4.2 XOSCRF4.4
GND5: ASWITCH5.PIN2 BTN5.2 C106.2 C107.2 C108.2 C109.1 C110.2 C111.2 C112.2 C113.2 C114.1 C115.1 C116.2 C117.2 C118.2 C119.2 C120.2 C122.1 C123.2 C126.2 FB11.2 LDO_VREG5.GND U$20.2 U$20.5 U$20.6 U$21.3 U$21.6 U$21.11 U$21.14 U$21.28 U$21.33 U$22.P$1 UFLANT5.1 UFLANT5.2 XOSCRF5.2 XOSCRF5.4
GND6: ASWITCH6.PIN2 BTN6.2 C127.2 C128.2 C129.2 C130.1 C131.2 C132.2 C133.2 C134.2 C135.1 C136.1 C137.2 C138.2 C139.2 C140.2 C141.2 C143.1 C144.2 C147.2 FB13.2 LDO_VREG6.GND U$24.2 U$24.5 U$24.6 U$25.3 U$25.6 U$25.11 U$25.14 U$25.28 U$25.33 U$26.P$1 UFLANT6.1 UFLANT6.2 XOSCRF6.2 XOSCRF6.4
GND7: ASWITCH7.PIN2 BTN7.2 C148.2 C149.2 C150.2 C151.1 C152.2 C153.2 C154.2 C155.2 C156.1 C157.1 C158.2 C159.2 C160.2 C161.2 C162.2 C164.1 C165.2 C168.2 FB15.2 LDO_VREG7.GND U$28.2 U$28.5 U$28.6 U$29.3 U$29.6 U$29.11 U$29.14 U$29.28 U$29.33 U$30.P$1 UFLANT7.1 UFLANT7.2 XOSCRF7.2 XOSCRF7.4
GND8: ASWITCH8.PIN2 BTN8.2 C169.2 C170.2 C171.2 C172.1 C173.2 C174.2 C175.2 C176.2 C177.1 C178.1 C179.2 C180.2 C181.2 C182.2 C183.2 C185.1 C186.2 C189.2 FB17.2 LDO_VREG8.GND U$32.2 U$32.5 U$32.6 U$33.3 U$33.6 U$33.11 U$33.14 U$33.28 U$33.33 U$34.P$1 UFLANT8.1 UFLANT8.2 XOSCRF8.2 XOSCRF8.4
GND9: ASWITCH9.PIN2 BTN9.2 C190.2 C191.2 C192.2 C193.1 C194.2 C195.2 C196.2 C197.2 C198.1 C199.1 C200.2 C201.2 C202.2 C203.2 C204.2 C206.1 C207.2 C210.2 FB19.2 LDO_VREG9.GND U$36.2 U$36.5 U$36.6 U$37.3 U$37.6 U$37.11 U$37.14 U$37.28 U$37.33 U$38.P$1 UFLANT9.1 UFLANT9.2 XOSCRF9.2 XOSCRF9.4
N$1: BTN1.1 R3.1
N$2: R6.2 RGBLED.3
N$3: CN2.GND FB3.1
N$4: CN1.VBUS FB2.1
N$5: CN1.GND FB1.1
N$6: CN2.VBUS FB4.1
N$7: R8.2 RGBLED1.2
N$8: R9.2 RGBLED1.3
N$9: R10.2 RGBLED1.4
N$10: R7.2 RGBLED.4
N$11: BTN2.1 R11.1
N$12: CN3.GND FB5.1
N$13: R4.2 RGBLED.2
N$14: CN3.VBUS FB6.1
N$15: R13.2 RGBLED2.2
N$16: R14.2 RGBLED2.3
N$17: R15.2 RGBLED2.4
N$18: BTN3.1 R16.1
N$19: CN4.GND FB7.1
N$20: CN4.VBUS FB8.1
N$21: R18.2 RGBLED3.2
N$22: R19.2 RGBLED3.3
N$23: R20.2 RGBLED3.4
N$24: BTN4.1 R21.1
N$25: CN5.GND FB9.1
N$26: BTN.1 R1.1
N$27: CN5.VBUS FB10.1
N$28: R23.2 RGBLED4.2
N$29: R24.2 RGBLED4.3
N$30: R25.2 RGBLED4.4
N$31: BTN5.1 R26.1
N$32: CN6.GND FB11.1
N$33: CN6.VBUS FB12.1
N$34: R28.2 RGBLED5.2
N$35: R29.2 RGBLED5.3
N$36: R30.2 RGBLED5.4
N$37: BTN6.1 R31.1
N$38: CN7.GND FB13.1
N$39: CN7.VBUS FB14.1
N$40: R33.2 RGBLED6.2
N$41: R34.2 RGBLED6.3
N$42: R35.2 RGBLED6.4
N$43: BTN7.1 R36.1
N$44: CN8.GND FB15.1
N$45: CN8.VBUS FB16.1
N$46: R38.2 RGBLED7.2
N$47: R39.2 RGBLED7.3
N$48: R40.2 RGBLED7.4
N$49: BTN8.1 R41.1
N$50: CN9.GND FB17.1
N$51: CN9.VBUS FB18.1
N$52: R43.2 RGBLED8.2
N$53: R44.2 RGBLED8.3
N$54: R45.2 RGBLED8.4
N$55: BTN9.1 R46.1
N$56: CN10.GND FB19.1
N$57: CN10.VBUS FB20.1
N$58: R48.2 RGBLED9.2
N$59: R49.2 RGBLED9.3
N$60: R50.2 RGBLED9.4
PA1: U$3.27
PA2: U$8.27
PA3: U$13.27
PA4: U$17.27
PA5: U$21.27
PA6: U$25.27
PA06(R): R4.1 U$76.7
PA06(R)1: R8.1 U$3.7
PA06(R)2: R13.1 U$8.7
PA06(R)3: R18.1 U$13.7
PA06(R)4: R23.1 U$17.7
PA06(R)5: R28.1 U$21.7
PA06(R)6: R33.1 U$25.7
PA06(R)7: R38.1 U$29.7
PA06(R)8: R43.1 U$33.7
PA06(R)9: R48.1 U$37.7
PA7: U$29.27
PA07(G): R6.1 U$76.8
PA07(G)1: R9.1 U$3.8
PA07(G)2: R14.1 U$8.8
PA07(G)3: R19.1 U$13.8
PA07(G)4: R24.1 U$17.8
PA07(G)5: R29.1 U$21.8
PA07(G)6: R34.1 U$25.8
PA07(G)7: R39.1 U$29.8
PA07(G)8: R44.1 U$33.8
PA07(G)9: R49.1 U$37.8
PA8: U$33.27
PA08/I2C/SDA: ASWITCH.PIN6 C20.1 U$76.9
PA08/I2C/SDA1: ASWITCH1.PIN6 C39.1 U$3.9
PA08/I2C/SDA2: ASWITCH2.PIN6 C60.1 U$8.9
PA08/I2C/SDA3: ASWITCH3.PIN6 C81.1 U$13.9
PA08/I2C/SDA4: ASWITCH4.PIN6 C102.1 U$17.9
PA08/I2C/SDA5: ASWITCH5.PIN6 C123.1 U$21.9
PA08/I2C/SDA6: ASWITCH6.PIN6 C144.1 U$25.9
PA08/I2C/SDA7: ASWITCH7.PIN6 C165.1 U$29.9
PA08/I2C/SDA8: ASWITCH8.PIN6 C186.1 U$33.9
PA08/I2C/SDA9: ASWITCH9.PIN6 C207.1 U$37.9
PA9: U$37.27
PA09/I2C/SCL: ASWITCH.PIN4 C19.2 U$76.10
PA09/I2C/SCL1: ASWITCH1.PIN4 C38.2 U$3.10
PA09/I2C/SCL2: ASWITCH2.PIN4 C59.2 U$8.10
PA09/I2C/SCL3: ASWITCH3.PIN4 C80.2 U$13.10
PA09/I2C/SCL4: ASWITCH4.PIN4 C101.2 U$17.10
PA09/I2C/SCL5: ASWITCH5.PIN4 C122.2 U$21.10
PA09/I2C/SCL6: ASWITCH6.PIN4 C143.2 U$25.10
PA09/I2C/SCL7: ASWITCH7.PIN4 C164.2 U$29.10
PA09/I2C/SCL8: ASWITCH8.PIN4 C185.2 U$33.10
PA09/I2C/SCL9: ASWITCH9.PIN4 C206.2 U$37.10
PA14/XIN_MC/RX: U$76.15
PA14/XIN_MC/RX1: U$3.15
PA14/XIN_MC/RX2: U$8.15
PA14/XIN_MC/RX3: U$13.15
PA14/XIN_MC/RX4: U$17.15
PA14/XIN_MC/RX5: U$21.15
PA14/XIN_MC/RX6: U$25.15
PA14/XIN_MC/RX7: U$29.15
PA14/XIN_MC/RX8: U$33.15
PA14/XIN_MC/RX9: U$37.15
PA15/XOUT_MC/TX: U$76.16
PA15/XOUT_MC/TX1: U$3.16
PA15/XOUT_MC/TX2: U$8.16
PA15/XOUT_MC/TX3: U$13.16
PA15/XOUT_MC/TX4: U$17.16
PA15/XOUT_MC/TX5: U$21.16
PA15/XOUT_MC/TX6: U$25.16
PA15/XOUT_MC/TX7: U$29.16
PA15/XOUT_MC/TX8: U$33.16
PA15/XOUT_MC/TX9: U$37.16
PA16/I2C: U$76.17
PA16/I2C1: U$3.17
PA16/I2C2: U$8.17
PA16/I2C3: U$13.17
PA16/I2C4: U$17.17
PA16/I2C5: U$21.17
PA16/I2C6: U$25.17
PA16/I2C7: U$29.17
PA16/I2C8: U$33.17
PA16/I2C9: U$37.17
PA17/I2C: U$76.18
PA17/I2C1: U$3.18
PA17/I2C2: U$8.18
PA17/I2C3: U$13.18
PA17/I2C4: U$17.18
PA17/I2C5: U$21.18
PA17/I2C6: U$25.18
PA17/I2C7: U$29.18
PA17/I2C8: U$33.18
PA17/I2C9: U$37.18
PA18/INTA: U$76.19
PA18/INTA1: U$3.19
PA18/INTA2: U$8.19
PA18/INTA3: U$13.19
PA18/INTA4: U$17.19
PA18/INTA5: U$21.19
PA18/INTA6: U$25.19
PA18/INTA7: U$29.19
PA18/INTA8: U$33.19
PA18/INTA9: U$37.19
PA19/FSYNC: U$76.20
PA19/FSYNC1: U$3.20
PA19/FSYNC2: U$8.20
PA19/FSYNC3: U$13.20
PA19/FSYNC4: U$17.20
PA19/FSYNC5: U$21.20
PA19/FSYNC6: U$25.20
PA19/FSYNC7: U$29.20
PA19/FSYNC8: U$33.20
PA19/FSYNC9: U$37.20
PA24/USBDM: CN1.D- U$76.22
PA24/USBDM1: CN2.D- U$3.22
PA24/USBDM2: CN3.D- U$8.22
PA24/USBDM3: CN4.D- U$13.22
PA24/USBDM4: CN5.D- U$17.22
PA24/USBDM5: CN6.D- U$21.22
PA24/USBDM6: CN7.D- U$25.22
PA24/USBDM7: CN8.D- U$29.22
PA24/USBDM8: CN9.D- U$33.22
PA24/USBDM9: CN10.D- U$37.22
PA25/USBDP: CN1.D+ U$76.23
PA25/USBDP1: CN2.D+ U$3.23
PA25/USBDP2: CN3.D+ U$8.23
PA25/USBDP3: CN4.D+ U$13.23
PA25/USBDP4: CN5.D+ U$17.23
PA25/USBDP5: CN6.D+ U$21.23
PA25/USBDP6: CN7.D+ U$25.23
PA25/USBDP7: CN8.D+ U$29.23
PA25/USBDP8: CN9.D+ U$33.23
PA25/USBDP9: CN10.D+ U$37.23
PA27(B): R7.1 U$76.25
PA27(B)1: R10.1 U$3.25
PA27(B)2: R15.1 U$8.25
PA27(B)3: R20.1 U$13.25
PA27(B)4: R25.1 U$17.25
PA27(B)5: R30.1 U$21.25
PA27(B)6: R35.1 U$25.25
PA27(B)7: R40.1 U$29.25
PA27(B)8: R45.1 U$33.25
PA27(B)9: R50.1 U$37.25
PA28: U$76.27
PA30/SWCLK: U$1.P$4 U$76.31
PA30/SWCLK1: U$3.31 U$4.P$4
PA30/SWCLK2: U$8.31 U$9.P$4
PA30/SWCLK3: U$13.31 U$14.P$4
PA30/SWCLK4: U$17.31 U$18.P$4
PA30/SWCLK5: U$21.31 U$22.P$4
PA30/SWCLK6: U$25.31 U$26.P$4
PA30/SWCLK7: U$29.31 U$30.P$4
PA30/SWCLK8: U$33.31 U$34.P$4
PA30/SWCLK9: U$37.31 U$38.P$4
PA31/SWDIO: U$1.P$5 U$76.32
PA31/SWDIO1: U$3.32 U$4.P$5
PA31/SWDIO2: U$8.32 U$9.P$5
PA31/SWDIO3: U$13.32 U$14.P$5
PA31/SWDIO4: U$17.32 U$18.P$5
PA31/SWDIO5: U$21.32 U$22.P$5
PA31/SWDIO6: U$25.32 U$26.P$5
PA31/SWDIO7: U$29.32 U$30.P$5
PA31/SWDIO8: U$33.32 U$34.P$5
PA31/SWDIO9: U$37.32 U$38.P$5
RESET: C1.1 R1.2 R2.1 U$1.P$3 U$76.26
RESET1: C3.1 R3.2 R5.1 U$3.26 U$4.P$3
RESET2: C43.1 R11.2 R12.1 U$8.26 U$9.P$3
RESET3: C64.1 R16.2 R17.1 U$13.26 U$14.P$3
RESET4: C85.1 R21.2 R22.1 U$17.26 U$18.P$3
RESET5: C106.1 R26.2 R27.1 U$21.26 U$22.P$3
RESET6: C127.1 R31.2 R32.1 U$25.26 U$26.P$3
RESET7: C148.1 R36.2 R37.1 U$29.26 U$30.P$3
RESET8: C169.1 R41.2 R42.1 U$33.26 U$34.P$3
RESET9: C190.1 R46.2 R47.1 U$37.26 U$38.P$3
RFN: U$12.3 U$76.13
RFN1: U$2.3 U$3.13
RFN2: U$7.3 U$8.13
RFN3: U$11.3 U$13.13
RFN4: U$16.3 U$17.13
RFN5: U$20.3 U$21.13
RFN6: U$24.3 U$25.13
RFN7: U$28.3 U$29.13
RFN8: U$32.3 U$33.13
RFN9: U$36.3 U$37.13
RFP: U$12.4 U$76.12
RFP1: U$2.4 U$3.12
RFP2: U$7.4 U$8.12
RFP3: U$11.4 U$13.12
RFP4: U$16.4 U$17.12
RFP5: U$20.4 U$21.12
RFP6: U$24.4 U$25.12
RFP7: U$28.4 U$29.12
RFP8: U$32.4 U$33.12
RFP9: U$36.4 U$37.12
RFSWITCH_PIN1: ASWITCH.PIN1 C24.1
RFSWITCH_PIN2: ASWITCH1.PIN1 C41.1
RFSWITCH_PIN3: ASWITCH.PIN3 C23.2
RFSWITCH_PIN4: ASWITCH1.PIN5 C37.2
RFSWITCH_PIN5: ASWITCH.PIN5 C18.2
RFSWITCH_PIN6: ASWITCH1.PIN3 C40.2
RFSWITCH_PIN7: ASWITCH2.PIN1 C62.1
RFSWITCH_PIN8: ASWITCH2.PIN5 C58.2
RFSWITCH_PIN9: ASWITCH2.PIN3 C61.2
RFSWITCH_PIN10: ASWITCH3.PIN1 C83.1
RFSWITCH_PIN11: ASWITCH3.PIN5 C79.2
RFSWITCH_PIN12: ASWITCH3.PIN3 C82.2
RFSWITCH_PIN13: ASWITCH4.PIN1 C104.1
RFSWITCH_PIN14: ASWITCH4.PIN5 C100.2
RFSWITCH_PIN15: ASWITCH4.PIN3 C103.2
RFSWITCH_PIN16: ASWITCH5.PIN1 C125.1
RFSWITCH_PIN17: ASWITCH5.PIN5 C121.2
RFSWITCH_PIN18: ASWITCH5.PIN3 C124.2
RFSWITCH_PIN19: ASWITCH6.PIN1 C146.1
RFSWITCH_PIN20: ASWITCH6.PIN5 C142.2
RFSWITCH_PIN21: ASWITCH6.PIN3 C145.2
RFSWITCH_PIN22: ASWITCH7.PIN1 C167.1
RFSWITCH_PIN23: ASWITCH7.PIN5 C163.2
RFSWITCH_PIN24: ASWITCH7.PIN3 C166.2
RFSWITCH_PIN25: ASWITCH8.PIN1 C188.1
RFSWITCH_PIN26: ASWITCH8.PIN5 C184.2
RFSWITCH_PIN27: ASWITCH8.PIN3 C187.2
RFSWITCH_PIN28: ASWITCH9.PIN1 C209.1
RFSWITCH_PIN29: ASWITCH9.PIN5 C205.2
RFSWITCH_PIN30: ASWITCH9.PIN3 C208.2
VDDANA: C8.1 C22.2 L6.2 U$76.4
VDDANA1: C31.2 C35.1 L2.2 U$3.4
VDDANA2: C52.2 C56.1 L4.2 U$8.4
VDDANA3: C73.2 C77.1 L7.2 U$13.4
VDDANA4: C94.2 C98.1 L9.2 U$17.4
VDDANA5: C115.2 C119.1 L11.2 U$21.4
VDDANA6: C136.2 C140.1 L13.2 U$25.4
VDDANA7: C157.2 C161.1 L15.2 U$29.4
VDDANA8: C178.2 C182.1 L17.2 U$33.4
VDDANA9: C199.2 C203.1 L19.2 U$37.4
VDDCORE: C9.1 U$76.29
VDDCORE1: C36.1 U$3.29
VDDCORE2: C57.1 U$8.29
VDDCORE3: C78.1 U$13.29
VDDCORE4: C99.1 U$17.29
VDDCORE5: C120.1 U$21.29
VDDCORE6: C141.1 U$25.29
VDDCORE7: C162.1 U$29.29
VDDCORE8: C183.1 U$33.29
VDDCORE9: C204.1 U$37.29
VIN: C6.1 C7.1 FB2.2 LDO_VREG.VIN
VIN1: C33.1 C34.1 FB4.2 LDO_VREG1.VIN
VIN2: C54.1 C55.1 FB6.2 LDO_VREG2.VIN
VIN3: C75.1 C76.1 FB8.2 LDO_VREG3.VIN
VIN4: C96.1 C97.1 FB10.2 LDO_VREG4.VIN
VIN5: C117.1 C118.1 FB12.2 LDO_VREG5.VIN
VIN6: C138.1 C139.1 FB14.2 LDO_VREG6.VIN
VIN7: C159.1 C160.1 FB16.2 LDO_VREG7.VIN
VIN8: C180.1 C181.1 FB18.2 LDO_VREG8.VIN
VIN9: C201.1 C202.1 FB20.2 LDO_VREG9.VIN
XTALIN: C14.2 U$76.2 XOSCRF.1
XTALIN1: C25.2 U$3.2 XOSCRF1.1
XTALIN2: C46.2 U$8.2 XOSCRF2.1
XTALIN3: C67.2 U$13.2 XOSCRF3.1
XTALIN4: C88.2 U$17.2 XOSCRF4.1
XTALIN5: C109.2 U$21.2 XOSCRF5.1
XTALIN6: C130.2 U$25.2 XOSCRF6.1
XTALIN7: C151.2 U$29.2 XOSCRF7.1
XTALIN8: C172.2 U$33.2 XOSCRF8.1
XTALIN9: C193.2 U$37.2 XOSCRF9.1
XTALOUT: C15.1 U$76.1 XOSCRF.3
XTALOUT1: C26.1 U$3.1 XOSCRF1.3
XTALOUT2: C47.1 U$8.1 XOSCRF2.3
XTALOUT3: C68.1 U$13.1 XOSCRF3.3
XTALOUT4: C89.1 U$17.1 XOSCRF4.3
XTALOUT5: C110.1 U$21.1 XOSCRF5.3
XTALOUT6: C131.1 U$25.1 XOSCRF6.3
XTALOUT7: C152.1 U$29.1 XOSCRF7.3
XTALOUT8: C173.1 U$33.1 XOSCRF8.3
XTALOUT9: C194.1 U$37.1 XOSCRF9.3

## Tracks (layer width: path | path; a pad name or v marks a point on that pad's centre or on a via)
3.3V  (via drill 0.2 pad 0.51)
  Top 0.203: LDO_VREG.VOUT 15.81,18.86 16,19.05 16,20.19 16.26,20.45 18.29,20.45 18.54,20.7 C5.1 | U$76.24 18.82,16.1 18.41,16.51 C10.1 18.13,16.1 17.91,15.88 16.38,15.88 15.75,15.24 15.75,14.48 15.49,14.22 | 13.84,14.22 13.84,18.86 | 15.49,14.22 U$1.P$2 | U$76.30 16.68,12.2 C16.1 16.03,12.03 15.75,12.32 15.75,13.97 15.49,14.22 | R2.2 13.46,8.89 13.84,9.27 13.84,14.22 | 14.61,14.22 U$1.P$2 | U$1.P$2 13.84,14.22 | RGBLED.1 26.59,6.01 26.42,5.84 21.08,5.84 L6.1
  Top 0.254: LDO_VREG.VOUT 13.84,18.86 13.65,18.86 C21.2
  Bottom 0.203: L6.1 19.81,7.11 14.99,7.11 13.3,8.79 R2.2
  other vias: 20.57,6.35 13.3,8.89
3.3V1  (via drill 0.2 pad 0.51)
  Top 0.203: LDO_VREG1.VOUT 60.52,18.86 60.71,19.05 60.71,20.19 60.96,20.45 62.99,20.45 63.25,20.7 C32.1 | U$3.24 63.53,16.1 63.12,16.51 C4.1 62.83,16.1 62.61,15.88 61.09,15.88 60.45,15.24 60.45,14.48 60.2,14.22 | 58.55,14.22 58.55,18.86 | 60.2,14.22 U$4.P$2 | U$3.30 61.38,12.2 C27.1 60.74,12.03 60.45,12.32 60.45,13.97 60.2,14.22 | R5.2 58.17,8.89 58.55,9.27 58.55,14.22 | 59.31,14.22 U$4.P$2 | U$4.P$2 58.55,14.22 | RGBLED1.1 71.29,6.01 71.12,5.84 65.79,5.84 L2.1
  Top 0.254: LDO_VREG1.VOUT 58.55,18.86 58.35,18.86 C30.2
  Bottom 0.203: L2.1 64.52,7.11 59.69,7.11 58.01,8.79 R5.2
  other vias: 65.28,6.35 58.01,8.89
3.3V2  (via drill 0.2 pad 0.51)
  Top 0.203: LDO_VREG2.VOUT 15.81,38.17 16,38.35 16,39.5 16.26,39.75 18.29,39.75 18.54,40.01 C53.1 | U$8.24 18.82,35.41 18.41,35.81 C44.1 18.13,35.4 17.91,35.18 16.38,35.18 15.75,34.54 15.75,33.78 15.49,33.53 | 13.84,33.53 13.84,38.17 | 15.49,33.53 U$9.P$2 | U$8.30 16.68,31.51 C48.1 16.03,31.34 15.75,31.62 15.75,33.27 15.49,33.53 | R12.2 13.46,28.19 13.84,28.57 13.84,33.53 | 14.61,33.53 U$9.P$2 | U$9.P$2 13.84,33.53 | RGBLED2.1 26.59,25.32 26.42,25.15 21.08,25.15 L4.1
  Top 0.254: LDO_VREG2.VOUT 13.84,38.17 13.65,38.17 C51.2
  Bottom 0.203: L4.1 19.81,26.42 14.99,26.42 13.3,28.1 R12.2
  other vias: 20.57,25.65 13.3,28.19
3.3V3  (via drill 0.2 pad 0.51)
  Top 0.203: LDO_VREG3.VOUT 60.52,38.17 60.71,38.35 60.71,39.5 60.96,39.75 62.99,39.75 63.25,40.01 C74.1 | U$13.24 63.53,35.41 63.12,35.81 C65.1 62.83,35.4 62.61,35.18 61.09,35.18 60.45,34.54 60.45,33.78 60.2,33.53 | 58.55,33.53 58.55,38.17 | 60.2,33.53 U$14.P$2 | U$13.30 61.38,31.51 C69.1 60.74,31.34 60.45,31.62 60.45,33.27 60.2,33.53 | R17.2 58.17,28.19 58.55,28.57 58.55,33.53 | 59.31,33.53 U$14.P$2 | U$14.P$2 58.55,33.53 | RGBLED3.1 71.29,25.32 71.12,25.15 65.79,25.15 L7.1
  Top 0.254: LDO_VREG3.VOUT 58.55,38.17 58.35,38.17 C72.2
  Bottom 0.203: L7.1 64.52,26.42 59.69,26.42 58.01,28.1 R17.2
  other vias: 65.28,25.65 58.01,28.19
3.3V4  (via drill 0.2 pad 0.51)
  Top 0.203: LDO_VREG4.VOUT 15.81,57.47 16,57.66 16,58.8 16.26,59.05 18.29,59.05 18.54,59.31 C95.1 | U$17.24 18.82,54.71 18.41,55.12 C86.1 18.13,54.71 17.91,54.48 16.38,54.48 15.75,53.85 15.75,53.09 15.49,52.83 | 13.84,52.83 13.84,57.47 | 15.49,52.83 U$18.P$2 | U$17.30 16.68,50.81 C90.1 16.03,50.64 15.75,50.93 15.75,52.58 15.49,52.83 | R22.2 13.46,47.5 13.84,47.88 13.84,52.83 | 14.61,52.83 U$18.P$2 | U$18.P$2 13.84,52.83 | RGBLED4.1 26.59,44.62 26.42,44.45 21.08,44.45 L9.1
  Top 0.254: LDO_VREG4.VOUT 13.84,57.47 13.65,57.47 C93.2
  Bottom 0.203: L9.1 19.81,45.72 14.99,45.72 13.3,47.4 R22.2
  other vias: 20.57,44.96 13.3,47.5
3.3V5  (via drill 0.2 pad 0.51)
  Top 0.203: LDO_VREG5.VOUT 60.52,57.47 60.71,57.66 60.71,58.8 60.96,59.05 62.99,59.05 63.25,59.31 C116.1 | U$21.24 63.53,54.71 63.12,55.12 C107.1 62.83,54.71 62.61,54.48 61.09,54.48 60.45,53.85 60.45,53.09 60.2,52.83 | 58.55,52.83 58.55,57.47 | 60.2,52.83 U$22.P$2 | U$21.30 61.38,50.81 C111.1 60.74,50.64 60.45,50.93 60.45,52.58 60.2,52.83 | R27.2 58.17,47.5 58.55,47.88 58.55,52.83 | 59.31,52.83 U$22.P$2 | U$22.P$2 58.55,52.83 | RGBLED5.1 71.29,44.62 71.12,44.45 65.79,44.45 L11.1
  Top 0.254: LDO_VREG5.VOUT 58.55,57.47 58.35,57.47 C114.2
  Bottom 0.203: L11.1 64.52,45.72 59.69,45.72 58.01,47.4 R27.2
  other vias: 65.28,44.96 58.01,47.5
3.3V6  (via drill 0.2 pad 0.51)
  Top 0.203: LDO_VREG6.VOUT 15.81,76.77 16,76.96 16,78.11 16.26,78.36 18.29,78.36 18.54,78.61 C137.1 | U$25.24 18.82,74.01 18.41,74.42 C128.1 18.13,74.01 17.91,73.79 16.38,73.79 15.75,73.15 15.75,72.39 15.49,72.14 | 13.84,72.14 13.84,76.77 | 15.49,72.14 U$26.P$2 | U$25.30 16.68,70.12 C132.1 16.03,69.95 15.75,70.23 15.75,71.88 15.49,72.14 | R32.2 13.46,66.8 13.84,67.18 13.84,72.14 | 14.61,72.14 U$26.P$2 | U$26.P$2 13.84,72.14 | RGBLED6.1 26.59,63.92 26.42,63.75 21.08,63.75 L13.1
  Top 0.254: LDO_VREG6.VOUT 13.84,76.77 13.65,76.77 C135.2
  Bottom 0.203: L13.1 19.81,65.02 14.99,65.02 13.3,66.71 R32.2
  other vias: 20.57,64.26 13.3,66.8
3.3V7  (via drill 0.2 pad 0.51)
  Top 0.203: LDO_VREG7.VOUT 60.52,76.77 60.71,76.96 60.71,78.11 60.96,78.36 62.99,78.36 63.25,78.61 C158.1 | U$29.24 63.53,74.01 63.12,74.42 C149.1 62.83,74.01 62.61,73.79 61.09,73.79 60.45,73.15 60.45,72.39 60.2,72.14 | 58.55,72.14 58.55,76.77 | 60.2,72.14 U$30.P$2 | U$29.30 61.38,70.12 C153.1 60.74,69.95 60.45,70.23 60.45,71.88 60.2,72.14 | R37.2 58.17,66.8 58.55,67.18 58.55,72.14 | 59.31,72.14 U$30.P$2 | U$30.P$2 58.55,72.14 | RGBLED7.1 71.29,63.92 71.12,63.75 65.79,63.75 L15.1
  Top 0.254: LDO_VREG7.VOUT 58.55,76.77 58.35,76.77 C156.2
  Bottom 0.203: L15.1 64.52,65.02 59.69,65.02 58.01,66.71 R37.2
  other vias: 65.28,64.26 58.01,66.8
3.3V8  (via drill 0.2 pad 0.51)
  Top 0.203: LDO_VREG8.VOUT 15.81,96.08 16,96.27 16,97.41 16.26,97.66 18.29,97.66 18.54,97.92 C179.1 | U$33.24 18.82,93.32 18.41,93.73 C170.1 18.13,93.31 17.91,93.09 16.38,93.09 15.75,92.46 15.75,91.69 15.49,91.44 | 13.84,91.44 13.84,96.08 | 15.49,91.44 U$34.P$2 | U$33.30 16.68,89.42 C174.1 16.03,89.25 15.75,89.53 15.75,91.19 15.49,91.44 | R42.2 13.46,86.11 13.84,86.49 13.84,91.44 | 14.61,91.44 U$34.P$2 | U$34.P$2 13.84,91.44 | RGBLED8.1 26.59,83.23 26.42,83.06 21.08,83.06 L17.1
  Top 0.254: LDO_VREG8.VOUT 13.84,96.08 13.65,96.08 C177.2
  Bottom 0.203: L17.1 19.81,84.33 14.99,84.33 13.3,86.01 R42.2
  other vias: 20.57,83.57 13.3,86.11
3.3V9  (via drill 0.2 pad 0.51)
  Top 0.203: LDO_VREG9.VOUT 60.52,96.08 60.71,96.27 60.71,97.41 60.96,97.66 62.99,97.66 63.25,97.92 C200.1 | U$37.24 63.53,93.32 63.12,93.73 C191.1 62.83,93.31 62.61,93.09 61.09,93.09 60.45,92.46 60.45,91.69 60.2,91.44 | 58.55,91.44 58.55,96.08 | 60.2,91.44 U$38.P$2 | U$37.30 61.38,89.42 C195.1 60.74,89.25 60.45,89.53 60.45,91.19 60.2,91.44 | R47.2 58.17,86.11 58.55,86.49 58.55,91.44 | 59.31,91.44 U$38.P$2 | U$38.P$2 58.55,91.44 | RGBLED9.1 71.29,83.23 71.12,83.06 65.79,83.06 L19.1
  Top 0.254: LDO_VREG9.VOUT 58.55,96.08 58.35,96.08 C198.2
  Bottom 0.203: L19.1 64.52,84.33 59.69,84.33 58.01,86.01 R47.2
  other vias: 65.28,83.57 58.01,86.11
ANT_LINE
  Top 0.254: U$6.ANT 29.87,18.52 L1.1 28.65,16.66 C13.1
ANT_LINE1
  Top 0.254: U$5.ANT 74.57,18.52 L3.1 73.35,16.66 C12.1
ANT_LINE2
  Top 0.254: U$10.ANT 29.87,37.83 L5.1 28.65,35.97 C45.1
ANT_LINE3
  Top 0.254: U$15.ANT 74.57,37.83 L8.1 73.35,35.97 C66.1
ANT_LINE4
  Top 0.254: U$19.ANT 29.87,57.13 L10.1 28.65,55.27 C87.1
ANT_LINE5
  Top 0.254: U$23.ANT 74.57,57.13 L12.1 73.35,55.27 C108.1
ANT_LINE6
  Top 0.254: U$27.ANT 29.87,76.43 L14.1 28.65,74.57 C129.1
ANT_LINE7
  Top 0.254: U$31.ANT 74.57,76.43 L16.1 73.35,74.57 C150.1
ANT_LINE8
  Top 0.254: U$35.ANT 29.87,95.74 L18.1 28.65,93.88 C171.1
ANT_LINE9
  Top 0.254: U$39.ANT 74.57,95.74 L20.1 73.35,93.88 C192.1
ANT_OUT
  Top 0.254: C18.1 29.21,15.75 28.96,16 27.69,16 27.32,15.64 U$12.1
ANT_OUT1
  Top 0.254: C37.1 73.91,15.75 73.66,16 72.39,16 72.02,15.64 U$2.1
ANT_OUT2
  Top 0.254: C58.1 29.21,35.05 28.96,35.31 27.69,35.31 27.32,34.94 U$7.1
ANT_OUT3
  Top 0.254: C79.1 73.91,35.05 73.66,35.31 72.39,35.31 72.02,34.94 U$11.1
ANT_OUT4
  Top 0.254: C100.1 29.21,54.36 28.96,54.61 27.69,54.61 27.32,54.24 U$16.1
ANT_OUT5
  Top 0.254: C121.1 73.91,54.36 73.66,54.61 72.39,54.61 72.02,54.24 U$20.1
ANT_OUT6
  Top 0.254: C142.1 29.21,73.66 28.96,73.91 27.69,73.91 27.32,73.55 U$24.1
ANT_OUT7
  Top 0.254: C163.1 73.91,73.66 73.66,73.91 72.39,73.91 72.02,73.55 U$28.1
ANT_OUT8
  Top 0.254: C184.1 29.21,92.96 28.96,93.22 27.69,93.22 27.32,92.85 U$32.1
ANT_OUT9
  Top 0.254: C205.1 73.91,92.96 73.66,93.22 72.39,93.22 72.02,92.85 U$36.1
ANT_SMD
  Top 0.254: L1.2 31.75,16.31 C11.1 31.75,14.32 C24.2
ANT_SMD1
  Top 0.254: L3.2 76.45,16.31 C42.1 76.45,14.32 C41.2
ANT_SMD2
  Top 0.254: L5.2 31.75,35.61 C63.1 31.75,33.62 C62.2
ANT_SMD3
  Top 0.254: L8.2 76.45,35.61 C84.1 76.45,33.62 C83.2
ANT_SMD4
  Top 0.254: L10.2 31.75,54.91 C105.1 31.75,52.93 C104.2
ANT_SMD5
  Top 0.254: L12.2 76.45,54.91 C126.1 76.45,52.93 C125.2
ANT_SMD6
  Top 0.254: L14.2 31.75,74.22 C147.1 31.75,72.23 C146.2
ANT_SMD7
  Top 0.254: L16.2 76.45,74.22 C168.1 76.45,72.23 C167.2
ANT_SMD8
  Top 0.254: L18.2 31.75,93.52 C189.1 31.75,91.54 C188.2
ANT_SMD9
  Top 0.254: L20.2 76.45,93.52 C210.1 76.45,91.54 C209.2
ANT_UFL
  Top 0.254: C23.1 29.87,9.14 UFLANT.3
ANT_UFL1
  Top 0.254: C40.1 74.57,9.14 UFLANT1.3
ANT_UFL2
  Top 0.254: C61.1 29.87,28.45 UFLANT2.3
ANT_UFL3
  Top 0.254: C82.1 74.57,28.45 UFLANT3.3
ANT_UFL4
  Top 0.254: C103.1 29.87,47.75 UFLANT4.3
ANT_UFL5
  Top 0.254: C124.1 74.57,47.75 UFLANT5.3
ANT_UFL6
  Top 0.254: C145.1 29.87,67.06 UFLANT6.3
ANT_UFL7
  Top 0.254: C166.1 74.57,67.06 UFLANT7.3
ANT_UFL8
  Top 0.254: C187.1 29.87,86.36 UFLANT8.3
ANT_UFL9
  Top 0.254: C208.1 74.57,86.36 UFLANT9.3
AVDD
  Top 0.203: U$76.5 20.82,8.98 C17.1
AVDD1
  Top 0.203: U$3.5 65.53,8.98 C28.1
AVDD2
  Top 0.203: U$8.5 20.82,28.29 C49.1
AVDD3
  Top 0.203: U$13.5 65.53,28.29 C70.1
AVDD4
  Top 0.203: U$17.5 20.82,47.59 C91.1
AVDD5
  Top 0.203: U$21.5 65.53,47.59 C112.1
AVDD6
  Top 0.203: U$25.5 20.82,66.89 C133.1
AVDD7
  Top 0.203: U$29.5 65.53,66.89 C154.1
AVDD8
  Top 0.203: U$33.5 20.82,86.2 C175.1
AVDD9